# Altium PCB SPARKy watch PCB MK2.PcbDoc (part 2 of 2)
Units mm, origin at the board's own origin, x right, y up, seen from the top; angles counter-clockwise.
Board outline 67 x 34.75 mm, 2 copper layers (Component Side, Bottom Layer), stack 0.325 mm thick; 94 components, 71 nets, 348 pads, 81 vias.
Unrouted connection lines stored in the file: 3.
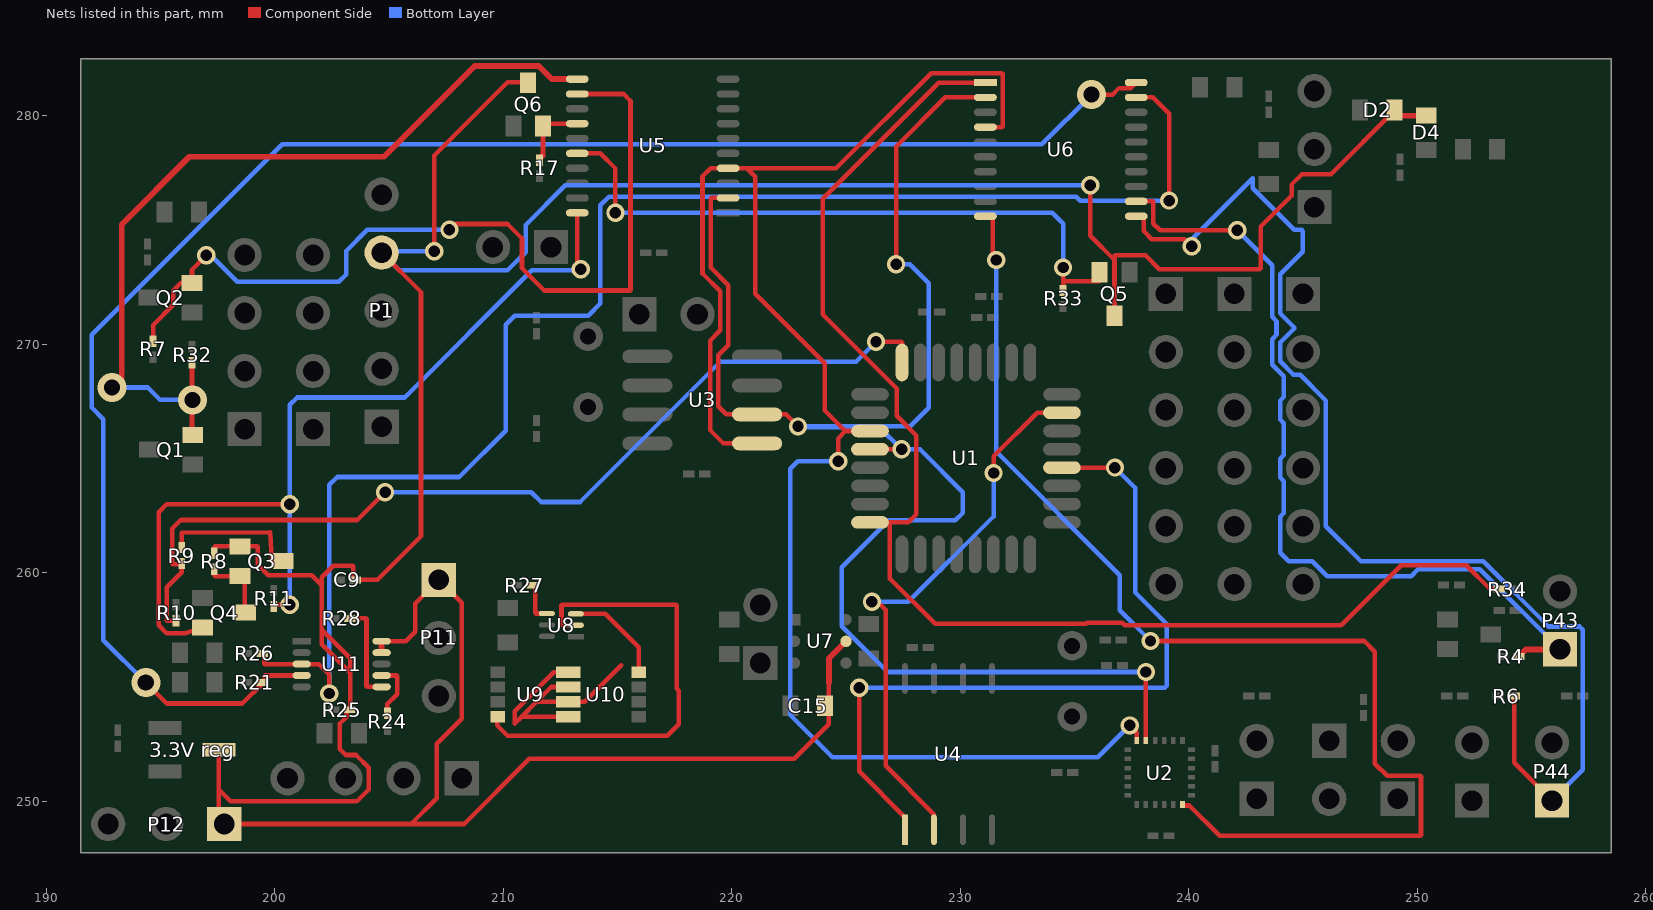
[diagram p2: the nets of this part, all layers, seen from the top]

## Via types
v1: diameter 0.8, hole 0.5, Component Side to Bottom Layer, 68 vias
v2: diameter 0.25, hole 0.2, Component Side to Bottom Layer, 9 vias
v3: diameter 1.27, hole 0.711, Component Side to Bottom Layer, 4 vias

## Nets (pads, with @x,y where several pads share a name; then routed paths per layer and width w, separated by ;. In a path a pad name is that pad's centre, name@x,y a point inside that pad or via, vN(x,y) a via of type N, cw(c..) or ccw(c..) an arc to the next point about the centre after c; other vN are vias at no path point) (continued)
NetP43_1: P43.1 R4.2 U6.12 | length 37.1
  Component Side w0.2: U6.12@237.7,276.25 238.43,276.25 238.455,276.225 238.455,275.272 238.747,274.98 v1(242.125,274.98)
  Component Side w0.254: R4.2@254.449,256.33 254.762,256.643 P43.1@256.25,256.643
  Bottom Layer w0.2: v1(242.125,274.98) 243.65,273.456 243.65,271.2 243.84,271.01 243.84,270.408 243.65,270.218 243.65,269.1 244.157,268.592 244.157,267.691 244,267.533 244,266.705 244.157,266.547 244.157,265.151 244,264.993 244,264.165 244.157,264.007 244.157,262.611 244,262.453 244,260.868 244.37,260.499 245.414,260.499 246.064,259.849 249.735,259.849 250.035,260.149 252.744,260.149 P43.1@256.25,256.643
NetP44_1: P44.1 R6.2 U6.11 | length 52.1
  Component Side w0.2: U6.11@237.7,275.6 238.023,275.6 238.023,274.955 238.379,274.599 239.814,274.599 v1(240.132,274.282) ; R6.2@254.249,254.599 254.249,251.674 P44.1@255.899,250.024
  Bottom Layer w0.2: v1(240.132,274.282) 240.132,274.599 242.799,277.266 242.799,276.822 244.62,275 244.943,275 244.998,274.945 244.998,274.05 244,273.052 244,271.345 244.615,270.731 244.615,270.688 244,270.073 244,269.245 244.586,268.659 244.874,268.659 246,267.533 246,262.037 247.538,260.499 252.889,260.499 255.745,257.643 257.104,257.643 257.25,257.496 257.25,255.789 257.242,255.782 257.251,255.773 257.251,251.377 P44.1@255.899,250.024
NetQ1_2: Q1.2 R32.2 U5.11 | length 37.2
  Component Side w0.2: R32.2@196.377,269.184 196.377,266.059 Q1.2@196.402,266.034
  Component Side w0.254: v3@193.302,267.989 193.302,275.242 196.26,278.2 204.777,278.2 208.754,282.177 211.554,282.177 212.131,281.6 U5.11@213.239,281.6
  Bottom Layer w0.2: v3(192.877,268.104) 194.435,268.104 194.978,267.561 v3(196.402,267.561)
NetQ2_2: Q2.2 R7.2 U5.12 | length 38.4
  Component Side w0.2: R7.2@194.677,270.134 194.677,270.84 195.555,271.718 195.555,272.342 195.897,272.684 Q2.2@196.377,272.684 196.377,273.263 v1(197.002,273.888) ; v1(207.645,275.006) 207.899,275.26 210.185,275.26 210.82,274.625 210.82,273.317 211.788,272.349 215.557,272.349 215.57,272.362 215.57,280.645 215.265,280.95 U5.12@213.239,280.95
  Bottom Layer w0.2: v1(197.002,273.888) 197.206,273.888 198.361,272.733 202.806,272.733 203.124,273.05 203.124,274.079 204.051,275.006 v1(207.645,275.006)
NetQ3_2: Q3.2 Q4.3 R8.1 | length 3.3
  Component Side w0.2: R8.1@197.352,260.15 197.352,259.882 197.383,259.85 Q3.2@198.477,259.85 198.679,259.85 198.679,258.25 Q4.3@198.737,258.25
NetQ3_3: Q3.3 R9.2 | length 6.3
  Component Side w0.2: R9.2@195.928,261.1 195.928,261.747 199.796,261.772 199.873,260.525 Q3.3@200.377,260.5
NetQ4_2: Q4.2 R11.2 U5.20 | length 40.2
  Component Side w0.2: Q4.2@196.837,257.6 196.095,257.353 195.262,257.353 194.92,257.696 194.92,262.649 195.262,262.992 v1(200.66,262.992) ; R11.2@199.953,258.518 199.953,258.597 v1(200.66,258.597) ; U5.20@213.239,275.75 213.233,275.75 213.233,273.431 v1(213.385,273.279)
  Bottom Layer w0.2: v1(200.66,258.597) v1(200.66,262.992) 200.66,267.348 200.977,267.665 205.689,267.665 211.252,273.228 213.081,273.228 213.131,273.279 v1(213.385,273.279)
NetQ5_2: Q5.2 R33.2 U5.16 | length 28.6
  Component Side w0.2: U5.16@213.239,278.35 214.249,278.35 214.909,277.69 v1(214.909,275.748) ; R33.2@234.5,272.35 234.5,272.72 ; v1(234.5,273.355) 234.5,272.72 ; Q5.2@236.1,273.149 236.1,272.745 234.525,272.745 234.5,272.72
  Bottom Layer w0.2: v1(214.909,275.748) 234.025,275.748 234.5,275.272 v1(234.5,273.355)
NetQ6_2: Q6.2@211.739,279.55 R17.2 U5.14 | length 3.3
  Component Side w0.2: R17.2@211.589,278.05 211.589,278.232 211.739,278.232 Q6.2@211.739,279.55 211.739,279.65 U5.14@213.239,279.65
NetR9_1: R9.1 R10.2 U1.24 | length 41.7
  Component Side w0.2: R10.2@195.677,257.9 195.301,257.9 195.275,257.925 195.275,259.359 195.928,260.012 R9.1@195.928,260.375 ; R9.1@195.928,260.4 R9.1@195.928,260.375 ; v1(204.826,263.525) 203.606,262.306 195.885,262.306 195.504,261.925 195.504,260.401 195.529,260.375 R9.1@195.928,260.375 ; v1(226.314,270.104) 227.425,270.104 227.45,270.078 U1.24@227.45,269.2
  Bottom Layer w0.2: v1(204.826,263.525) 211.226,263.525 211.658,263.093 213.36,263.093 219.507,269.24 225.45,269.24 v1(226.314,270.104)
NetR21_2: R21.2 U6.20 U11.4 | length 74.4
  Component Side w0.2: v3(194.354,255.194) 195.274,254.274 198.583,254.274 199.452,255.143 R21.2@199.452,255.196 199.542,255.196 199.542,255.475 199.568,255.5 U11.4@201.177,255.5 ; v3(235.75,280.925) 236.665,280.925 236.95,281.21 237.46,281.21 U6.20@237.7,281.45
  Bottom Layer w0.2: v3(194.354,255.194) 192.5,257.048 192.5,266.722 191.992,267.23 191.992,270.41 200.332,278.75 233.575,278.75 v3(235.75,280.925)
NetR24_2: R24.2 U11.7 | length 2.5
  Component Side w0.2: U11.7@204.677,255.5 205.334,255.5 205.359,255.475 205.359,254.686 204.927,254.254 R24.2@204.927,253.85
NetR26_2: R26.2 U6.19 U11.3 | length 66.4
  Component Side w0.2: R26.2@199.452,256.466 199.542,256.466 199.542,256.025 199.568,256 U11.3@201.177,256 201.93,256 202.387,255.543 v1(202.387,254.711) ; U6.19@237.7,280.8 238.43,280.8 239.141,280.089 v1(239.141,276.285)
  Bottom Layer w0.2: v1(202.387,254.711) 202.387,263.842 202.73,264.185 208.077,264.185 210.109,266.217 210.109,270.853 210.502,271.247 213.716,271.247 214.249,271.78 214.249,276.073 214.63,276.454 235.077,276.454 235.245,276.285 v1(239.141,276.285)
NetR27_1: R27.1 U8.4 | length 1.8
  Component Side w0.2: R27.1@211.277,259.446 211.404,259.446 211.404,258.238 211.43,258.212 U8.4@211.907,258.212
NetR28_2: R28.2 U11.6 | length 4.4
  Component Side w0.2: R28.2@203.277,258 203.987,258 204.013,257.975 204.013,255.025 204.038,255 U11.6@204.677,255
NetR34_1: R34.1 U1.32 U6.1 | length 58.5
  Component Side w0.2: U1.32@226.05,262.2 226.898,262.2 ; U6.1@231.1,281.45 229.057,281.45 223.977,276.37 223.977,271.297 227.214,268.061 227.214,266.869 228.084,265.999 228.084,262.564 227.719,262.2 226.898,262.2 ; R34.1@253.599,259.284 253.186,259.284 252.146,260.325 249.301,260.325 246.676,257.7 237.192,257.7 237.086,257.805 235.553,257.805 235.505,257.757 228.907,257.757 226.924,259.74 226.924,262.175 226.898,262.2
NetR37_1: U1.28 U2.23 U3.6 U5.2 U6.2 | length 74.2
  Component Side w0.2: U5.2@219.839,276.4 219.1,276.4 219.075,276.375 219.075,273.355 219.85,272.58 219.85,269.961 219.409,269.52 219.409,267.277 219.761,266.926 U3.6@221.109,266.926 222.374,266.926 v1(222.898,266.402) ; U1.28@226.05,265.4 v1(227.432,265.4) ; v1(227.193,273.496) 227.193,278.653 229.34,280.8 U6.2@231.1,280.8 ; U2.23@238.128,252.649 v1(238.128,255.651)
  Bottom Layer w0.2: v1(227.193,273.496) 227.796,273.496 228.625,272.667 228.625,267.221 227.806,266.402 v1(222.898,266.402) 222.93,266.37 226.462,266.37 v1(227.432,265.4) 228.239,265.4 230.114,263.525 230.114,262.611 229.789,262.286 226.873,262.286 224.819,260.232 224.819,257.654 226.822,255.651 v1(238.128,255.651)
NetR38_1: U1.27 U2.24 U3.5 U5.4 U6.4 | length 77.8
  Component Side w0.2: 220.662,277.7 221.031,277.332 221.031,272.208 224.069,269.169 224.069,267.098 224.968,266.2 ; U3.5@221.109,265.656 219.637,265.656 219.05,266.243 219.05,270.154 219.5,270.605 219.5,272.313 218.719,273.094 218.719,277.344 219.075,277.7 U5.4@219.839,277.7 224.563,277.7 228.727,281.864 231.826,281.864 231.851,281.838 231.851,279.525 231.826,279.5 U6.4@231.1,279.5 ; v1(224.663,264.871) 224.663,265.87 224.968,266.2 ; U1.27@226.05,266.2 224.968,266.2 ; v1(237.423,253.314) 237.728,253.009 U2.24@237.728,252.649
  Bottom Layer w0.2: v1(224.663,264.871) 222.885,264.871 222.555,264.541 222.555,253.771 224.409,251.917 236.026,251.917 v1(237.423,253.314)
NetU1_12: U1.12 U4.1 | length 33.3
  Component Side w0.2: v1(225.577,254.965) 225.577,251.302 227.579,249.301 U4.1@227.579,248.75 ; U1.12@234.45,264.6 v1(236.771,264.6)
  Bottom Layer w0.2: v1(225.577,254.965) 238.953,254.965 239.029,255.041 239.029,257.757 237.65,259.136 237.65,263.721 v1(236.771,264.6)
NetU1_15: U1.15 U4.2 | length 24.5
  Component Side w0.2: v1(226.136,258.724) 226.377,258.724 226.734,258.368 226.734,251.549 228.849,249.435 U4.2@228.849,248.75 ; v1(231.457,264.363) 231.457,265.095 233.362,267 U1.15@234.45,267
  Bottom Layer w0.2: v1(226.136,258.724) 227.724,258.724 231.457,262.458 v1(231.457,264.363)
NetU2_12: U2.12 U6.10 | length 52.5
  Component Side w0.2: U6.10@231.1,275.6 231.419,275.6 231.419,273.837 v1(231.572,273.685) ; v1(238.328,257.01) 247.679,257.01 248.149,256.54 248.149,251.638 248.682,251.104 250.139,251.104 250.165,251.079 250.165,248.508 250.139,248.483 241.356,248.483 240.03,249.809 239.728,249.809 U2.12@239.728,249.849
  Bottom Layer w0.2: v1(231.572,273.685) 231.572,265.303 236.982,259.893 236.982,258.356 v1(238.328,257.01)
NetU8_2: U8.2 U9.4 | length 20.5
  Component Side w0.2: U9.4@209.75,253.696 209.728,253.696 209.728,253.314 210.185,252.857 217.17,252.857 217.678,253.365 217.678,254.838 217.586,254.931 217.586,258.572 217.56,258.597 212.573,258.597 212.547,258.572 212.547,257.722 212.573,257.696 U8.2@213.177,257.696
NetU8_3: U8.3 U10.4 | length 4.4
  Component Side w0.2: U8.3@213.177,258.196 214.467,258.196 215.927,256.736 U10.4@215.927,255.646
NetU9_5: U9.5 U9.6 U9.7 U9.8 U10.5 U10.6 U10.7 U10.8 | length 14.7
  Component Side w0.2: U9.5@212.62,253.696 U10.8@212.829,253.696 ; U9.6@212.62,254.346 U10.7@212.859,254.346 ; U9.7@212.62,254.996 U10.6@212.838,254.996 ; U9.8@212.62,255.646 U10.5@212.868,255.646 ; U10.8@213.057,253.696 U10.8@212.877,253.696 ; U10.6@213.057,254.996 U10.6@212.877,254.996 ; U10.5@213.057,255.646 U10.5@212.877,255.646 ; 215.167,255.943 213.571,254.346 U10.7@213.057,254.346 U10.7@212.877,254.346 ; 210.806,253.696 211.456,254.346 ; 210.806,253.696 210.51,253.4 210.51,253.939 212.217,255.646 U10.5@212.868,255.646 ; 210.806,253.696 U10.8@212.829,253.696 ; 211.456,254.346 212.106,254.996 U10.6@212.838,254.996 ; 211.456,254.346 U10.7@212.859,254.346 ; U10.8@212.829,253.696 U10.8@212.877,253.696 ; U10.8@212.829,253.696 212.853,253.721 U10.8@212.877,253.696 ; U10.6@212.838,254.996 U10.6@212.877,254.996 ; U10.6@212.838,254.996 212.858,255.016 U10.6@212.877,254.996 ; U10.7@212.859,254.346 U10.7@212.877,254.346 ; U10.7@212.859,254.346 212.868,254.356 U10.7@212.877,254.346 ; U10.5@212.868,255.646 U10.5@212.877,255.646 ; U10.5@212.868,255.646 212.873,255.651 U10.5@212.877,255.646
"V BAT": "3.3V reg.1" C9.2 C15.2 D2.2 D4.2 P1.4 P11.1 P12.1@197.787,249 Q3.1 Q5.3 Q6.3@211.089,281.45 R8.2 R25.1 U7.5 U11.9 U11.10 | length 168
  Component Side w0.2: R8.2@197.352,260.85 197.352,261.119 197.383,261.15 Q3.1@198.477,261.15 199.238,261.15 199.263,261.125 199.263,260.337 199.707,259.893 201.612,259.893 202.057,259.448 ; 197.552,252.25 197.552,250.507 ; U11.10@204.677,257 205.74,257 206.146,257.406 206.146,258.652 P11.1@207.177,259.682 208.178,258.681 208.178,253.602 207.086,252.51 207.086,250.126 205.96,249 ; P1.4@204.677,274.004 206.4,272.281 206.4,261.587 204.495,259.682 C9.2@203.527,259.682 203.429,259.682 203.429,260.274 203.403,260.299 202.565,260.299 202.057,259.791 202.057,259.448 ; v1(206.985,274.066) 206.985,278.257 210.185,281.457 211.089,281.457 Q6.3@211.089,281.45 ; 224.25,255.196 224.25,253.365 222.734,251.849 211.137,251.849 208.288,249 205.96,249 ; v1(235.687,276.95) 235.687,274.748 236.75,273.685 ; Q5.3@236.75,271.249 236.75,273.685 ; D2.2@249,280.25 249,280.217 246.228,277.444 244.957,277.444 244.5,276.987 244.5,276.504 243.143,275.147 243.143,273.321 243.103,273.282 238.715,273.282 238.108,273.888 236.775,273.888 236.75,273.863 236.75,273.685 ; 197.552,250.507 198.073,249.987 203.594,249.987 204.114,250.507 204.114,251.46 203.556,252.019 203.098,252.019 202.852,252.265 202.852,253.398 203.149,253.695 203.149,254 R25.1@203.277,254 203.302,254 203.302,255.626 ; 197.552,250.507 197.552,249.235 P12.1@197.787,249 205.96,249 ; 202.057,257.505 202.057,259.448 ; 202.057,257.505 203.302,256.261 203.302,255.626 ; 202.057,257.505 202.057,256.87 203.302,255.626
  Component Side w0.254: U11.9@204.677,256.5 U11.10@204.677,257 ; 224.25,255.196 224.25,256.246 U7.5@224.999,256.995 ; D2.2@249,280.25 249.25,280 D4.2@250.399,280
  Bottom Layer w0.2: v1(206.985,274.066) 204.739,274.066 P1.4@204.677,274.004 205.454,273.228 210.185,273.228 210.986,274.028 210.986,275.215 212.721,276.95 v1(235.687,276.95)
pads on no net: P10.2 P10.3 Q6.2@251.325,256.65 R100.1 U1.10 U1.23 U2.2 U2.3 U2.4 U2.5 U2.6 U2.7 U2.14 U2.15 U2.16 U2.17 U2.19 U2.21 U5.1 U5.3 U5.8 U5.10 U5.13 U5.18 U5.19 U6.3 U6.8 U6.15 U6.18 U8.1
copper on no net: | length 247.4
  Component Side w0.2: 174.75,302.793 175,303.043 175,320.75 177.75,320.75 ; 174.75,305.793 172,305.793 172,317.75 174.75,317.75 ; 175,325 175,317.75 177.75,317.75 177.75,320.75 ; 178,305.793 178,302.793 180.75,302.793 ; 183.75,305.793 183.75,302.793 ; 177.75,320.75 180.75,320.75 ; 180.75,302.793 180.75,320.75 ; 180.75,302.793 183.75,302.793 ; 180.75,302.793 180.75,320.75 ; 180.75,320.75 184,320.75 184,303.043 183.75,302.793
  Bottom Layer w0.2: 174.75,302.793 174.75,320.75 178,320.75 178,317.75 174.75,317.75 ; 174.75,305.793 172,305.793 172,317.75 174.75,317.75 ; 174.75,325 174.75,317.75 ; 177.75,320.75 180.75,320.75 ; 178,305.793 178,302.793 180.75,302.793 ; 183.75,305.793 183.75,302.793 ; 180.75,302.793 180.75,320.75 ; 180.75,302.793 183.75,302.793 ; 180.75,302.793 180.75,320.75 ; 180.75,320.75 184,320.75 184,303.043 183.75,302.793
  other v2: 238.225,250.733 238.725,250.733 239.325,250.733 238.225,251.233 238.725,251.233 239.325,251.233 238.225,251.733 238.725,251.733 239.325,251.733

## Keep-outs
Keep-Out Layer:
  lines w0.1: 171.75,306.043 171.75,317.5 184,317.5 184,306.043 171.75,306.043 ; 183.75,224.863 183.75,294.863 293.75,294.863 293.75,224.863 183.75,224.863

## Other copper
Component Side:
  text "100XXXX ISSUE 1" at 173.75,335.25 h2.5
  text "1" at 172.75,303.543 h2.5
  text "4" at 405.662,105.85 h3
  text "TOP ELEC" at 434.35,105.85 h3
Bottom Layer:
  text "4" at 181.75,303.5 h2.5
  text "11" at 404.384,105.85 h3
  text "BOTTOM ELEC" at 434.35,105.85 h3

## Silkscreen, mask and mechanical layers (free items; w line width, h text height)
Top Paste:
  text "2" at 405.662,105.85 h3
  text "TOP SOLDER PASTE" at 434.35,105.85 h3
Bottom Paste:
  text "13" at 404.384,105.85 h3
  text "BOTTOM SOLDER PASTE" at 434.35,105.85 h3
Top Solder:
  rectangle: 192.75,340.25 205.25,343.75
  text "3" at 405.662,105.85 h3
  text "TOP SOLDER RESIST" at 434.35,105.85 h3
Solder Side:
  rectangle: 177.25,343.5 189.75,347
  text "12" at 404.384,105.85 h3
  text "BOTTOM SOLDER RESIST" at 434.35,105.85 h3
Mechanical 5:
  drawing of 6820 lines, arcs and shapes, not listed
  text "1" at 138.126,384.5 h4
  text "2" at 186.222,384.5 h4
  text "3" at 234.722,384.5 h4
  text "4" at 283.222,384.5 h4
  text "5" at 331.722,384.5 h4
  text "6" at 380.222,384.5 h4
  text "7" at 428.722,384.5 h4
  text "8" at 477.222,384.5 h4
  text "DO NOT SCALE - IF IN DOUBT ASK" at 265.25,376.5 h6
  text "A" at 503.897,368.98 h4
  text "A" at 101.359,364.134 h4
  text "B" at 503.897,320.48 h4
  text "B" at 101.359,315.634 h4
  text "C" at 503.897,271.98 h4
  text "C" at 101.359,267.134 h4
  text "D" at 503.897,223.48 h4
  text "D" at 101.359,218.634 h4
  text "E" at 503.864,174.921 h4
  text "E" at 101.359,170.134 h4
  text "NO. OF LAYERS:" at 169.088,149.85 h3
  text "GENERAL NOTES" at 237.338,149.85 h3
  text "DR'N:" at 469.588,149.85 h3
  text "THE INFORMATION CONTAINED" at 111.338,148.6 h4.5
  text "PROJECTION" at 447.338,147.85 h3
  text "MATERIAL:" at 169.088,145.85 h3
  text "FR4 TO IPC4101/99 OR ABOVE WITH" at 184.838,145.85 h3
  text "1. THIS PCB SHALL BE MANUFACTURED IN ACCORDANCE WITH IPC-6012 CLASS 2." at 237.338,145.85 h3
  text "DATE:" at 469.588,145.85 h3
  text "HEREIN SHALL NOT BE REPRODUCED" at 106.088,143.85 h4.5
  text "A  FLIR  COMPANY" at 417.778,142.337 h3
  text "MINIMUM Tg RATING OF 170" at 184.838,141.85 h3
  text "2. MANUFACTURER LOGO AND UL MARK (94V-0) TO BE ADDED TO SOLDER RESIST ARTWORK IN AREA SHOWN." at 237.338,141.85 h3
  text "CK'D:" at 469.588,141.85 h3
  text "WITHOUT THE PRIOR" at 119.338,139.1 h4.5
  text "BOARD THICKNESS:" at 169.088,137.85 h3
  text "OVER PLATING" at 206.588,137.85 h3
  text "3. ALL PCB'S TO BE ELECTRICALY TESTED TO IPC-9252." at 237.338,137.85 h3
  text "DATE:" at 469.588,137.85 h3
  text "C" at 398.781,136.359 h4
  text "2014 RAYMARINE LTD" at 404.781,136.359 h4
  text "WRITTEN PERMISSION OF" at 116.338,134.6 h4.5
  text "SURFACE FINISH:" at 169.088,133.85 h3
  text "ENIG TO IPC-4552 CLASS 2" at 194.088,133.85 h3
  text "4. PCB NUMBER, ISSUE AND TITLE TO BE INCLUDED IN COPPER ON LAYER 1." at 237.338,133.85 h3
  text "TEXT TO BE IN UPPER CASE AND" at 340.588,133.85 h3
  text "APPR:" at 469.588,133.85 h3
  text "RAYMARINE LTD" at 123.338,130.1 h4.5
  text "SOLDER RESIST:" at 169.088,129.85 h3
  text "GREEN PHOTO IMAGEABLE TO" at 194.088,129.85 h3
  text "BETWEEN 1.5mm AND 4.0mm IN HEIGHT." at 240.588,129.85 h3
  text "DIMENSIONS IN MM" at 407.088,129.85 h3
  text "SCALE:" at 447.088,129.85 h3
  text "1:1" at 460.338,129.85 h3
  text "PROJECT:" at 469.588,129.85 h3
  text "F" at 101.359,127.798 h4
  text "TOLERANCES UNLESS OTHERWISE STATED" at 107.338,125.85 h3
  text "IPC-SM-840 CLASS T" at 194.088,125.85 h3
  text "5. PANEL WASTE AREA TO INCLUDE COPPER HATCHING." at 237.338,125.85 h3
  text "TITLE:" at 397.088,125.85 h3
  text "F" at 504.122,123.722 h4
  text "X" at 109.838,121.85 h3
  text "+/- 0.50" at 120.088,121.85 h3
  text "SHARP INTERNAL" at 139.588,121.85 h3
  text "MINIMUM TRACK WIDTH:" at 169.088,121.85 h3
  text "6. WHERE APPLICABLE IMPEDANCE TEST COUPONS SHALL BE SUPPLIED." at 237.338,121.85 h3
  text ".X" at 109.338,117.85 h3
  text "+/- 0.25" at 120.088,117.85 h3
  text "CORNERS TO HAVE" at 138.088,117.85 h3
  text "MINIMUM TRACK SPACING:" at 169.088,117.85 h3
  text "7. REFER TO PURCHASE ORDER FOR DEVIATIONS FROM THIS DRAWING." at 237.338,117.85 h3
  text "DRAWING No." at 397.088,116.1 h3
  text "REVISION:" at 449.588,116.1 h3
  text ".XX" at 109.338,113.85 h3
  text "+/- 0.10" at 120.088,113.85 h3
  text "HAVE RADIUS 0.80" at 139.088,113.85 h3
  text "CONTROLLED IMPEDANCE BUILD:" at 169.088,113.85 h3
  text "8. SOLDER MASK: NO BLOCKING OF PINS WITHOUT WRITTEN PERMISSION OF RAYMARINE" at 237.338,113.6 h3
  text "A" at 496.588,113.1 h8
  text ".XXX" at 109.338,109.85 h3
  text "+/- 0.05" at 120.088,109.85 h3
  text "MAX UNLESS" at 142.088,109.85 h3
  text "9. SURFACE MICROVIAS TO BE FILLED TO IPC SPECIFICATIONS" at 237.338,109.75 h3
  text "3" at 497.338,106.35 h8
  text "ANGLES   +/- 1" at 109.588,105.85 h3
  text "OTHERWISE STATED" at 137.338,105.85 h3
  text "SHT        OF" at 397.088,105.85 h3
  text "13" at 413.753,105.85 h3
  text "LAYER:" at 423.338,105.85 h3
  text "1" at 133.236,101.243 h4
  text "2" at 181.332,101.243 h4
  text "3" at 229.835,101.243 h4
  text "4" at 278.335,101.243 h4
  text "5" at 326.992,101.243 h4
  text "8" at 472.507,101.18 h4
  text "6" at 375.462,101.116 h4
  text "7" at 424.022,100.988 h4
Mechanical 6:
  drawing of 6830 lines, arcs and shapes, not listed
  text "1" at 138.126,682.607 h4
  text "2" at 186.222,682.607 h4
  text "3" at 234.722,682.607 h4
  text "4" at 283.222,682.607 h4
  text "5" at 331.722,682.607 h4
  text "6" at 380.222,682.607 h4
  text "7" at 428.722,682.607 h4
  text "8" at 477.222,682.607 h4
  text "DO NOT SCALE - IF IN DOUBT ASK" at 265.25,674.607 h6
  text "A" at 503.897,667.087 h4
  text "A" at 101.359,662.242 h4
  text "B" at 503.897,618.587 h4
  text "B" at 101.359,613.742 h4
  text "C" at 503.897,570.087 h4
  text "C" at 101.359,565.242 h4
  text "D" at 503.897,521.587 h4
  text "D" at 101.359,516.742 h4
  text "E" at 503.864,473.028 h4
  text "REV." at 397,470.957 h2
  text "REVISION DESCRIPTION" at 432.5,470.957 h2
  text "ECN/ECO" at 492.5,470.957 h2
  text "E" at 101.359,468.242 h4
  text "1" at 398.5,468.207 h2
  text "INITIAL DESIGN" at 403.162,468.207 h2
  text "E-XX-XXXX" at 491.915,468.207 h2
  text "GENERAL NOTES" at 169.088,447.957 h3
  text "DR'N:" at 469.588,447.957 h3
  text ".ASY_Drawn_By" at 478.088,447.955 h3
  text "THE INFORMATION CONTAINED" at 111.338,446.707 h4.5
  text "PROJECTION" at 447.338,445.957 h3
  text "1. THIS PCB SHALL BE ASSEMBLED IN ACCORDANCE WITH IPC-A-610 CLASS 2." at 169.088,443.957 h3
  text "DATE:" at 469.588,443.957 h3
  text ".ASY_Drawn_Date" at 478.088,443.951 h3
  text "HEREIN SHALL NOT BE REPRODUCED" at 106.088,441.957 h4.5
  text "A  FLIR  COMPANY" at 417.778,440.445 h3
  text "2. ALL ASPECTS OF THE MANUFACTURE OF THIS ASSEMBLY SHALL BE ROHS COMPLIANT." at 169.088,440.028 h3
  text "CK'D:" at 469.588,439.957 h3
  text ".ASY_Checked_By" at 478.088,439.957 h3
  text "WITHOUT THE PRIOR" at 119.338,437.207 h4.5
  text "DATE:" at 469.588,435.957 h3
  text ".ASY_Checked_Date" at 478.088,435.957 h3
  text "C" at 398.781,434.466 h4
  text "2014 RAYMARINE LTD" at 404.781,434.466 h4
  text "WRITTEN PERMISSION OF" at 116.338,432.707 h4.5
  text "APPR:" at 469.588,431.957 h3
  text "RAYMARINE LTD" at 123.338,428.207 h4.5
  text "DIMENSIONS IN MM" at 407.088,427.957 h3
  text "SCALE:" at 447.088,427.957 h3
  text "3:1" at 460.338,427.957 h3
  text "PROJECT:" at 469.588,427.957 h3
  text ".PCB_Project" at 484.588,427.957 h3
  text "F" at 101.359,425.905 h4
  text "TOLERANCES UNLESS OTHERWISE STATED" at 107.338,423.957 h3
  text "TITLE:" at 397.088,423.957 h3
  text ".PCB_Title" at 408.5,423.25 h4
  text "F" at 504.122,421.83 h4
  text "X" at 109.838,419.957 h3
  text "+/- 0.50" at 120.088,419.957 h3
  text "SHARP INTERNAL" at 139.588,419.957 h3
  text ".X" at 109.338,415.957 h3
  text "+/- 0.25" at 120.088,415.957 h3
  text "CORNERS TO HAVE" at 138.088,415.957 h3
  text "DRAWING No." at 397.088,414.207 h3
  text "REVISION:" at 449.588,414.207 h3
  text ".XX" at 109.338,411.957 h3
  text "+/- 0.10" at 120.088,411.957 h3
  text "HAVE RADIUS 0.80" at 139.088,411.957 h3
  text "A" at 496.588,411.207 h8
  text ".ASY_Number" at 397.088,408.207 h8
  text ".ASY_Revision" at 449.838,408.207 h8
  text ".XXX" at 109.338,407.957 h3
  text "+/- 0.05" at 120.088,407.957 h3
  text "MAX UNLESS" at 142.088,407.957 h3
  text "3" at 497.338,404.457 h8
  text "ANGLES   +/- 1" at 109.588,403.957 h3
  text "OTHERWISE STATED" at 137.338,403.957 h3
  text "SHT        OF" at 397.088,403.957 h3
  text "4" at 413.588,403.957 h3
  text "LAYER:" at 423.338,403.957 h3
  text "1" at 133.236,399.35 h4
  text "2" at 181.332,399.35 h4
  text "3" at 229.835,399.35 h4
  text "4" at 278.335,399.35 h4
  text "5" at 326.992,399.35 h4
  text "8" at 472.507,399.288 h4
  text "6" at 375.462,399.224 h4
  text "7" at 424.022,399.095 h4
Mechanical 7:
  drawing of 6830 lines, arcs and shapes, not listed
  text "8" at 130.166,682.607 h4
  text "7" at 178.667,682.607 h4
  text "6" at 227.167,682.607 h4
  text "5" at 275.667,682.607 h4
  text "4" at 324.167,682.607 h4
  text "3" at 372.667,682.607 h4
  text "2" at 421.167,682.607 h4
  text "1" at 469.263,682.607 h4
  text "DO NOT SCALE - IF IN DOUBT ASK" at 342.138,674.607 h6
  text "A" at 103.491,667.087 h4
  text "A" at 506.03,662.242 h4
  text "B" at 103.491,618.587 h4
  text "B" at 506.03,613.742 h4
  text "C" at 103.491,570.087 h4
  text "C" at 506.03,565.242 h4
  text "D" at 103.491,521.587 h4
  text "D" at 506.03,516.742 h4
  text "E" at 103.524,473.028 h4
  text "ECN/ECO" at 114.888,470.957 h2
  text "REVISION DESCRIPTION" at 174.888,470.957 h2
  text "REV." at 210.388,470.957 h2
  text "E" at 506.03,468.242 h4
  text "E-XX-XXXX" at 115.473,468.207 h2
  text "INITIAL DESIGN" at 204.227,468.207 h2
  text "1" at 208.888,468.207 h2
  text ".ASY_Drawn" at 129.3,447.955 h3
  text "DR'N:" at 137.8,447.957 h3
  text "GENERAL NOTES" at 438.3,447.957 h3
  text "THE INFORMATION CONTAINED" at 496.05,446.707 h4.5
  text "PROJECTION" at 160.05,445.957 h3
  text "DATE:" at 137.8,443.957 h3
  text "1. THIS PCB SHALL BE ASSEMBLED IN ACCORDANCE WITH IPC-A-610 CLASS 2." at 438.3,443.957 h3
  text ".ASY_Drawn_Date" at 129.3,443.951 h3
  text "HEREIN SHALL NOT BE REPRODUCED" at 501.3,441.957 h4.5
  text "A  FLIR  COMPANY" at 189.611,440.445 h3
  text "2. ALL ASPECTS OF THE MANUFACTURE OF THIS ASSEMBLY SHALL BE ROHS COMPLIANT." at 438.3,440.028 h3
  text ".ASY_Checked" at 129.3,439.957 h3
  text "CK'D:" at 137.8,439.957 h3
  text "WITHOUT THE PRIOR" at 488.05,437.207 h4.5
  text ".ASY_Checked_Date" at 129.3,435.957 h3
  text "DATE:" at 137.8,435.957 h3
  text "2014 RAYMARINE LTD" at 202.608,434.466 h4
  text "C" at 208.608,434.466 h4
  text "WRITTEN PERMISSION OF" at 491.05,432.707 h4.5
  text "APPR:" at 137.8,431.957 h3
  text "RAYMARINE LTD" at 484.05,428.207 h4.5
  text ".PCB_Project" at 122.8,427.957 h3
  text "PROJECT:" at 137.8,427.957 h3
  text "1:1" at 147.05,427.957 h3
  text "SCALE:" at 160.3,427.957 h3
  text "DIMENSIONS IN MM" at 200.3,427.957 h3
  text "F" at 506.03,425.905 h4
  text "TITLE:" at 210.3,423.957 h3
  text "TOLERANCES UNLESS OTHERWISE STATED" at 500.05,423.957 h3
  text ".PCB_Title" at 201.25,423.25 h4
  text "F" at 103.266,421.83 h4
  text "SHARP INTERNAL" at 467.8,419.957 h3
  text "+/- 0.50" at 487.3,419.957 h3
  text "X" at 497.55,419.957 h3
  text "CORNERS TO HAVE" at 469.3,415.957 h3
  text "+/- 0.25" at 487.3,415.957 h3
  text ".X" at 498.05,415.957 h3
  text "REVISION:" at 157.8,414.207 h3
  text "DRAWING No." at 210.3,414.207 h3
  text "HAVE RADIUS 0.80" at 468.3,411.957 h3
  text "+/- 0.10" at 487.3,411.957 h3
  text ".XX" at 498.05,411.957 h3
  text "A" at 110.8,411.207 h8
  text ".ASY_Revision" at 157.55,408.207 h8
  text ".ASY_Number" at 210.3,408.207 h8
  text "MAX UNLESS" at 465.3,407.957 h3
  text "+/- 0.05" at 487.3,407.957 h3
  text ".XXX" at 498.05,407.957 h3
  text "3" at 110.05,404.457 h8
  text "LAYER:" at 184.05,403.957 h3
  text "4" at 193.8,403.957 h3
  text "SHT        OF" at 210.3,403.957 h3
  text "OTHERWISE STATED" at 470.05,403.957 h3
  text "ANGLES   +/- 1" at 497.8,403.957 h3
  text "5" at 280.396,399.35 h4
  text "4" at 329.053,399.35 h4
  text "3" at 377.553,399.35 h4
  text "2" at 426.057,399.35 h4
  text "1" at 474.152,399.35 h4
  text "8" at 134.881,399.288 h4
  text "6" at 231.926,399.224 h4
  text "7" at 183.366,399.095 h4
Mechanical 10:
  lines w0.1: 183.75,224.863 293.75,224.863 293.75,294.863 183.75,294.863 183.75,224.863
Mechanical 13:
  text "TOP ASSEMBLY" at 440.5,419 h2.5
  text "1" at 405.338,403.957 h3
Mechanical 14:
  text "TOP ASSEMBLY CONVENTIONAL" at 434,419 h2.5
  text "2" at 405.75,403.957 h3
Drill Drawing:
  drawing of 299 lines, arcs and shapes, not listed
  text "SEE NOTE 2" at 180.25,505.75 h4
  text "CONTROLLED IMPEDANCE REQUIREMENTS" at 118.85,380.507 h2.5
  text "Layer" at 366.926,379.507 h2.5
  text "Name" at 377.646,379.507 h2.5
  text "Material" at 403.742,379.507 h2.5
  text "Thickness" at 425.95,379.507 h2.5
  text "Constant" at 441.145,379.507 h2.5
  text "Board Layer Stack" at 455.226,379.507 h2.5
  text "Filename" at 484.038,379.507 h2.5
  text "TRACK" at 107.85,376.757 h2.5
  text "REFERENCE" at 119.85,376.757 h2.5
  text "TRACK" at 155.85,376.757 h2.5
  text "TRACK" at 169.1,376.757 h2.5
  text "IMPEDANCE" at 137.85,375.507 h2.5
  text "1" at 366.926,374.507 h2.5
  text "Top Silk" at 377.646,374.507 h2.5
  text ".PCB_Number" at 478.038,374.507 h2.5
  text "-" at 486.708,374.507 h2.5
  text ".PCB_Revision" at 487.538,374.507 h2.5
  text ".GTO" at 488.588,374.507 h2.5
  text "LAYER" at 108.1,374.257 h2.5
  text "LAYER/S" at 121.85,374.257 h2.5
  text "WIDTH" at 156.1,374.257 h2.5
  text "SPACING" at 168.1,374.257 h2.5
  text "TOP ELEC" at 106.35,370.507 h2.5
  text "INNER X" at 122.1,370.507 h2.5
  text "50 OHM SE" at 138.35,370.507 h2.5
  text "XXXum" at 156.35,370.507 h2.5
  text "N/A" at 171.1,370.507 h2.5
  text "2" at 366.926,369.507 h2.5
  text "Top Solder Resist" at 377.646,369.507 h2.5
  text "Solder Resist" at 403.742,369.507 h2.5
  text "0.010mm" at 425.95,369.507 h2.5
  text "3.5" at 441.145,369.507 h2.5
  text ".PCB_Number" at 478.038,369.507 h2.5
  text "-" at 486.708,369.507 h2.5
  text ".PCB_Revision" at 487.538,369.507 h2.5
  text ".GTS" at 488.588,369.507 h2.5
  text "INNER X" at 107.35,366.757 h2.5
  text "INNER X" at 122.1,366.757 h2.5
  text "100 OHM DIFF" at 137.1,366.757 h2.5
  text "XXXum" at 156.35,366.757 h2.5
  text "XXXum" at 169.6,366.757 h2.5
  text "3" at 366.926,364.507 h2.5
  text "Top Elec" at 377.646,364.507 h2.5
  text "Copper" at 403.742,364.507 h2.5
  text "0.035mm" at 425.95,364.507 h2.5
  text ".PCB_Number" at 478.038,364.507 h2.5
  text "-" at 486.708,364.507 h2.5
  text ".PCB_Revision" at 487.538,364.507 h2.5
  text ".GTL" at 488.588,364.507 h2.5
  text "INNER X" at 107.35,363.007 h2.5
  text "INNER X" at 122.1,363.007 h2.5
  text "90 OHM DIFF" at 137.85,363.007 h2.5
  text "XXXum" at 156.35,363.007 h2.5
  text "XXXum" at 169.6,363.007 h2.5
  text "4" at 366.926,359.507 h2.5
  text "Dielectric 1" at 377.646,359.507 h2.5
  text "Shengyi S1000-2" at 403.742,359.507 h2.5
  text "0.140mm" at 425.95,359.507 h2.5
  text "4.2" at 441.145,359.507 h2.5
  text "BOT ELEC" at 106.35,359.257 h2.5
  text "INNER X" at 122.1,359.257 h2.5
  text "50 OHM SE" at 138.6,359.257 h2.5
  text "XXXum" at 156.35,359.257 h2.5
  text "N/A" at 171.1,359.257 h2.5
  text "5" at 366.926,354.507 h2.5
  text "Layer 2" at 377.646,354.507 h2.5
  text "Copper" at 403.742,354.507 h2.5
  text "0.017mm" at 425.95,354.507 h2.5
  text ".PCB_Number" at 478.038,354.507 h2.5
  text "-" at 486.708,354.507 h2.5
  text ".PCB_Revision" at 487.538,354.507 h2.5
  text ".G1" at 488.588,354.507 h2.5
  text "6" at 366.926,349.507 h2.5
  text "Dielectric 2" at 377.646,349.507 h2.5
  text "1.200mm" at 425.95,349.507 h2.5
  text "4.2" at 441.145,349.507 h2.5
  text "7" at 366.926,344.507 h2.5
  text "Layer 3" at 377.646,344.507 h2.5
  text "Copper" at 403.742,344.507 h2.5
  text "0.017mm" at 425.95,344.507 h2.5
  text ".PCB_Number" at 478.038,344.507 h2.5
  text "-" at 486.708,344.507 h2.5
  text ".PCB_Revision" at 487.538,344.507 h2.5
  text ".G2" at 488.588,344.507 h2.5
  text "8" at 366.926,339.507 h2.5
  text "Dielectric 3" at 377.646,339.507 h2.5
  text "Shengyi S1000-2" at 403.742,339.507 h2.5
  text "0.140mm" at 425.95,339.507 h2.5
  text "4.2" at 441.145,339.507 h2.5
  text "9" at 366.926,334.507 h2.5
  text "Bottom Elec" at 377.646,334.507 h2.5
  text "Copper" at 403.742,334.507 h2.5
  text "0.035mm" at 425.95,334.507 h2.5
  text ".PCB_Number" at 478.038,334.515 h2.5
  text "-" at 486.708,334.515 h2.5
  text ".PCB_Revision" at 487.538,334.515 h2.5
  text ".GBL" at 488.588,334.515 h2.5
  text "10" at 366.926,329.507 h2.5
  text "Bottom Solder Resist" at 377.646,329.507 h2.5
  text "Solder Resist" at 403.742,329.507 h2.5
  text "0.010mm" at 425.95,329.507 h2.5
  text "3.5" at 441.145,329.507 h2.5
  text ".PCB_Number" at 478.038,329.507 h2.5
  text "-" at 486.708,329.507 h2.5
  text ".PCB_Revision" at 487.538,329.507 h2.5
  text ".GBS" at 488.588,329.507 h2.5
  text "11" at 366.926,324.507 h2.5
  text "Bottom Silk" at 377.646,324.507 h2.5
  text ".PCB_Number" at 478,324.507 h2.5
  text "-" at 486.67,324.507 h2.5
  text ".PCB_Revision" at 487.5,324.507 h2.5
  text ".GBO" at 488.55,324.507 h2.5
  text "ADDITIONAL DATA" at 415.25,266.5 h4
  text "FABRICATION DRAWING (THIS DRAWING)" at 366.322,259.5 h2.5
  text ".PCB_Number" at 478.038,259.507 h2.5
  text "-" at 486.708,259.5 h2.5
  text ".PCB_Revision" at 487.538,259.5 h2.5
  text ".GD1" at 488.588,259.507 h2.5
  text "PLATING DRILL FILE" at 366.322,254.5 h2.5
  text ".PCB_Number" at 478.038,254.507 h2.5
  text "-" at 486.708,254.507 h2.5
  text ".PCB_Revision" at 487.538,254.507 h2.5
  text ".TXT" at 488.588,254.507 h2.5
  text "NON PLATED DRILL FILE" at 366.322,249.5 h2.5
  text ".PCB_Number" at 478.038,249.507 h2.5
  text "-" at 486.708,249.507 h2.5
  text ".PCB_Revision" at 487.538,249.507 h2.5
  text ".DRR" at 488.588,249.515 h2.5
  text ".IPC" at 488.588,244.515 h2.5
  text "IPC-D-356 NETLIST" at 366.322,244.5 h2.5
  text ".PCB_Number" at 478.038,244.507 h2.5
  text "-" at 486.708,244.5 h2.5
  text ".PCB_Revision" at 487.538,244.5 h2.5
  text "_FAB.ZIP" at 488.588,239.515 h2.5
  text "FABRICATION DATA ZIP FILE" at 366.322,239.5 h2.5
  text ".PCB_Number" at 478.038,239.507 h2.5
  text "-" at 486.708,239.507 h2.5
  text ".PCB_Revision" at 487.538,239.507 h2.5
  text ".PCB_Number" at 477.788,234.5 h2.5
  text "-" at 486.458,234.5 h2.5
  text ".PCB_Revision" at 487.288,234.5 h2.5
  text ".GTP" at 488.338,234.5 h2.5
  text "TOP PASTE" at 366.246,234.243 h2.5
  text ".PCB_Number" at 477.996,229.25 h2.5
  text "-" at 486.666,229.25 h2.5
  text ".PCB_Revision" at 487.496,229.25 h2.5
  text ".GBP" at 488.546,229.25 h2.5
  text "BOTTOM PASTE" at 366.246,229.015 h2.5
  text "Symbol" at 108.214,176.309 h3.6
  text "Qty" at 122.212,176.309 h3.6
  text "Finished Hole Size" at 136.549,176.309 h3.6
  text "Plated" at 166.655,176.309 h3.6
  text "Hole Type" at 178.931,176.309 h3.6
  text "Tolerance" at 196.849,176.309 h3.6
  text "REV." at 397,172.85 h2
  text "REVISION DESCRIPTION" at 432.5,172.85 h2
  text "ECN/ECO" at 492.5,172.85 h2
  text "9" at 122.212,170.703 h3
  text "0.20mm" at 136.549,170.703 h3
  text "PTH" at 166.655,170.703 h3
  text "Round" at 178.931,170.703 h3
  text "1" at 398.5,170.1 h2
  text "INITIAL DESIGN" at 403.162,170.1 h2
  text "E-XX-XXXX" at 491.915,170.1 h2
  text "68" at 122.212,165.097 h3
  text "0.50mm" at 136.549,165.097 h3
  text "PTH" at 166.655,165.097 h3
  text "Round" at 178.931,165.097 h3
  text "4" at 122.212,159.49 h3
  text "0.70mm" at 136.549,159.49 h3
  text "PTH" at 166.655,159.49 h3
  text "Round" at 178.931,159.49 h3
  text "4" at 122.212,153.884 h3
  text "0.71mm" at 136.549,153.884 h3
  text "PTH" at 166.655,153.884 h3
  text "Round" at 178.931,153.884 h3
  text ".PCB_Electrical_Layer_Qty." at 192.088,149.85 h3
  text ".PCB_Drawn_By" at 478.588,149.85 h3
  text "62" at 122.212,148.278 h3
  text "0.90mm" at 136.549,148.278 h3
  text "PTH" at 166.655,148.278 h3
  text "Round" at 178.931,148.278 h3
  text ".PCB_Drawn_Date" at 478.588,145.85 h3
  text "147 Total" at 122.212,142.671 h3
  text ".PCB_Checked_By" at 478.588,141.85 h3
  text ".PCB_Board_Thickness" at 196.588,137.85 h3
  text ".PCB_Checked_Date" at 478.588,137.85 h3
  text ".PCB_Project" at 484.588,129.85 h3
  text ".PCB_Min_Track" at 203.838,121.85 h3
  text ".PCB_Title" at 397.088,120.6 h5
  text ".PCB_Min_Space" at 206.338,117.85 h3
  text ".PCB_Controlled_Impedance_Build" at 215.338,113.85 h3
  text ".PCB_Number" at 397.088,110.1 h8
  text ".PCB_Revision" at 449.838,110.1 h8
  text "1" at 405.662,105.85 h3
  text "FABRICATION DRAWING" at 434.35,105.85 h3
Mechanical 18:
  lines w0.2: 512.238,346.19 549.068,346.19 ; 512.238,350 549.068,350 ; 512.238,353.81 549.068,353.81 ; 512.238,357.62 549.068,357.62 ; 512.238,361.43 549.068,361.43 ; 512.238,365.24 549.068,365.24 ; 512.238,369.05 549.068,369.05 ; 512.238,372.86 549.068,372.86 ; 512.238,376.67 549.068,376.67 ; 512.238,380.48 549.068,380.48 ; 512.238,384.29 684.323,384.29 ; 521.128,342.38 521.128,384.29 ; 534.463,342.38 534.463,384.29 ; 549.068,228.08 684.323,228.08 ; 549.068,231.89 684.323,231.89 ; 549.068,334.76 549.068,388.1 ; 571.293,224.27 571.293,231.89 ; 512.238,342.38 549.068,342.38 549.068,224.27 684.323,224.27 684.323,388.1 512.238,388.1 512.238,342.38
  text "HISTORY" at 513.508,385.5 h2.5
  text "DESIGN COMMENTS" at 550.338,385.25 h2.5
  text "ISSUE" at 513.5,381.5 h2.5
  text "DESIGNER" at 522.25,381.5 h2.5
  text "DATE" at 538.75,381.5 h2.5
  text "IDF FILENAME" at 550.338,228.715 h1.42
  text "SCHEMATIC FILE" at 550.338,224.905 h1.42
Mechanical 23:
  text "BOTTOM ASSEMBLY" at 168.5,419 h2.5
  text "3" at 202.6,403.957 h3
Mechanical 24:
  text "BOTTOM ASSEMBLY CONVENTIONAL" at 177.75,419 h2.5
  text "4" at 202.05,403.957 h3